# Altium PCB Main-Flight-Computer-Card.PcbDoc
Units mm, origin at the board's own origin, x right, y up, seen from the top; angles counter-clockwise.
Board outline 100 x 100 mm, 4 copper layers (Top Layer, Int1 (GND), Int2 (PWR), Bottom Layer), stack 1.369 mm thick; 2 components, 0 nets, 72 pads, 0 vias.
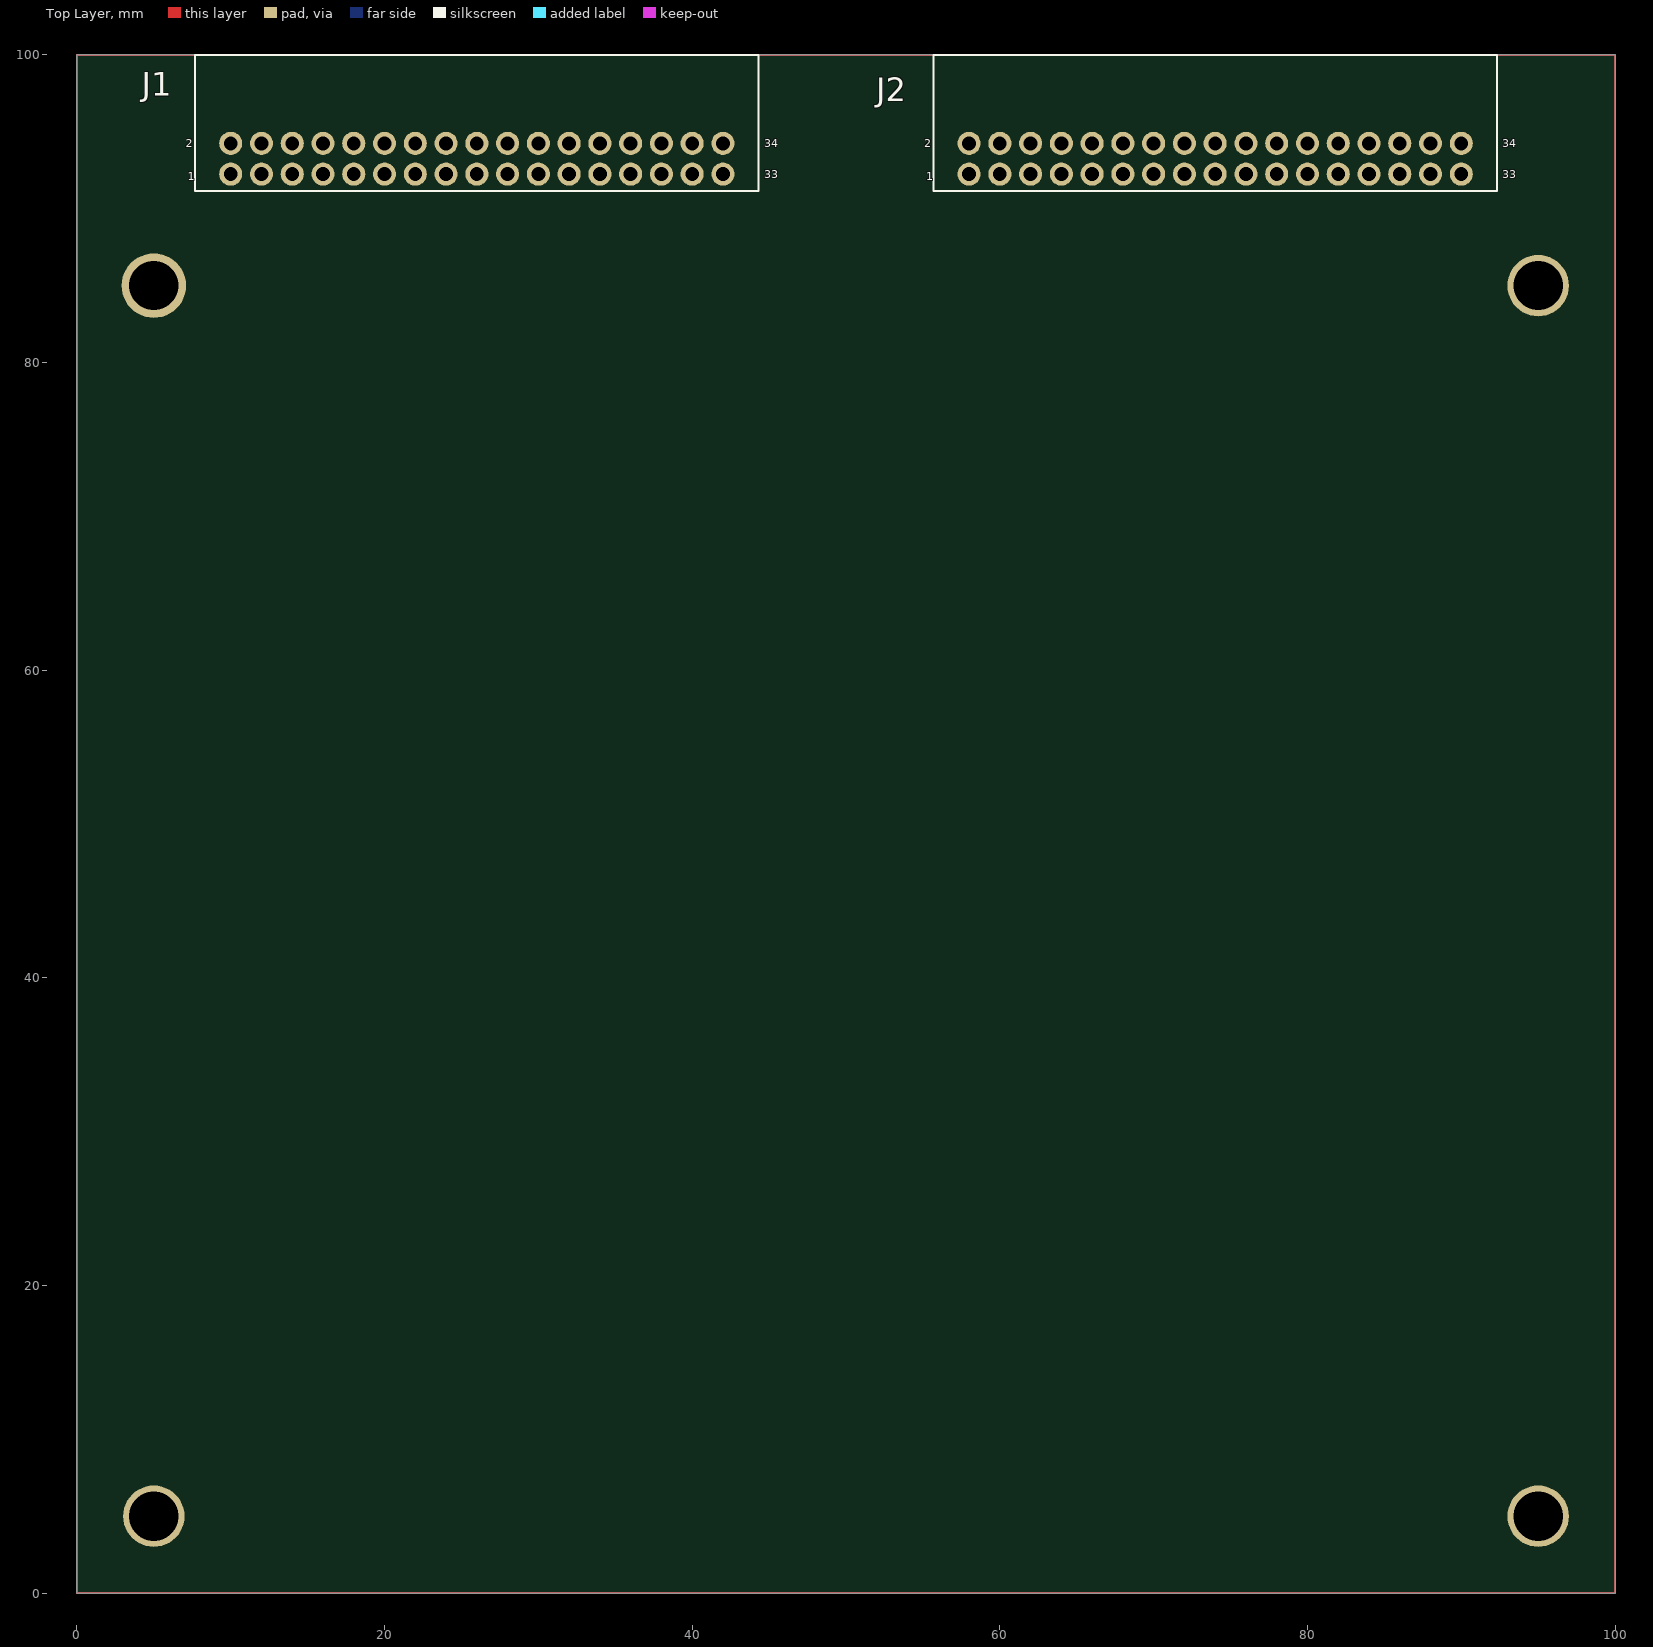
[diagram p0: Top Layer view]
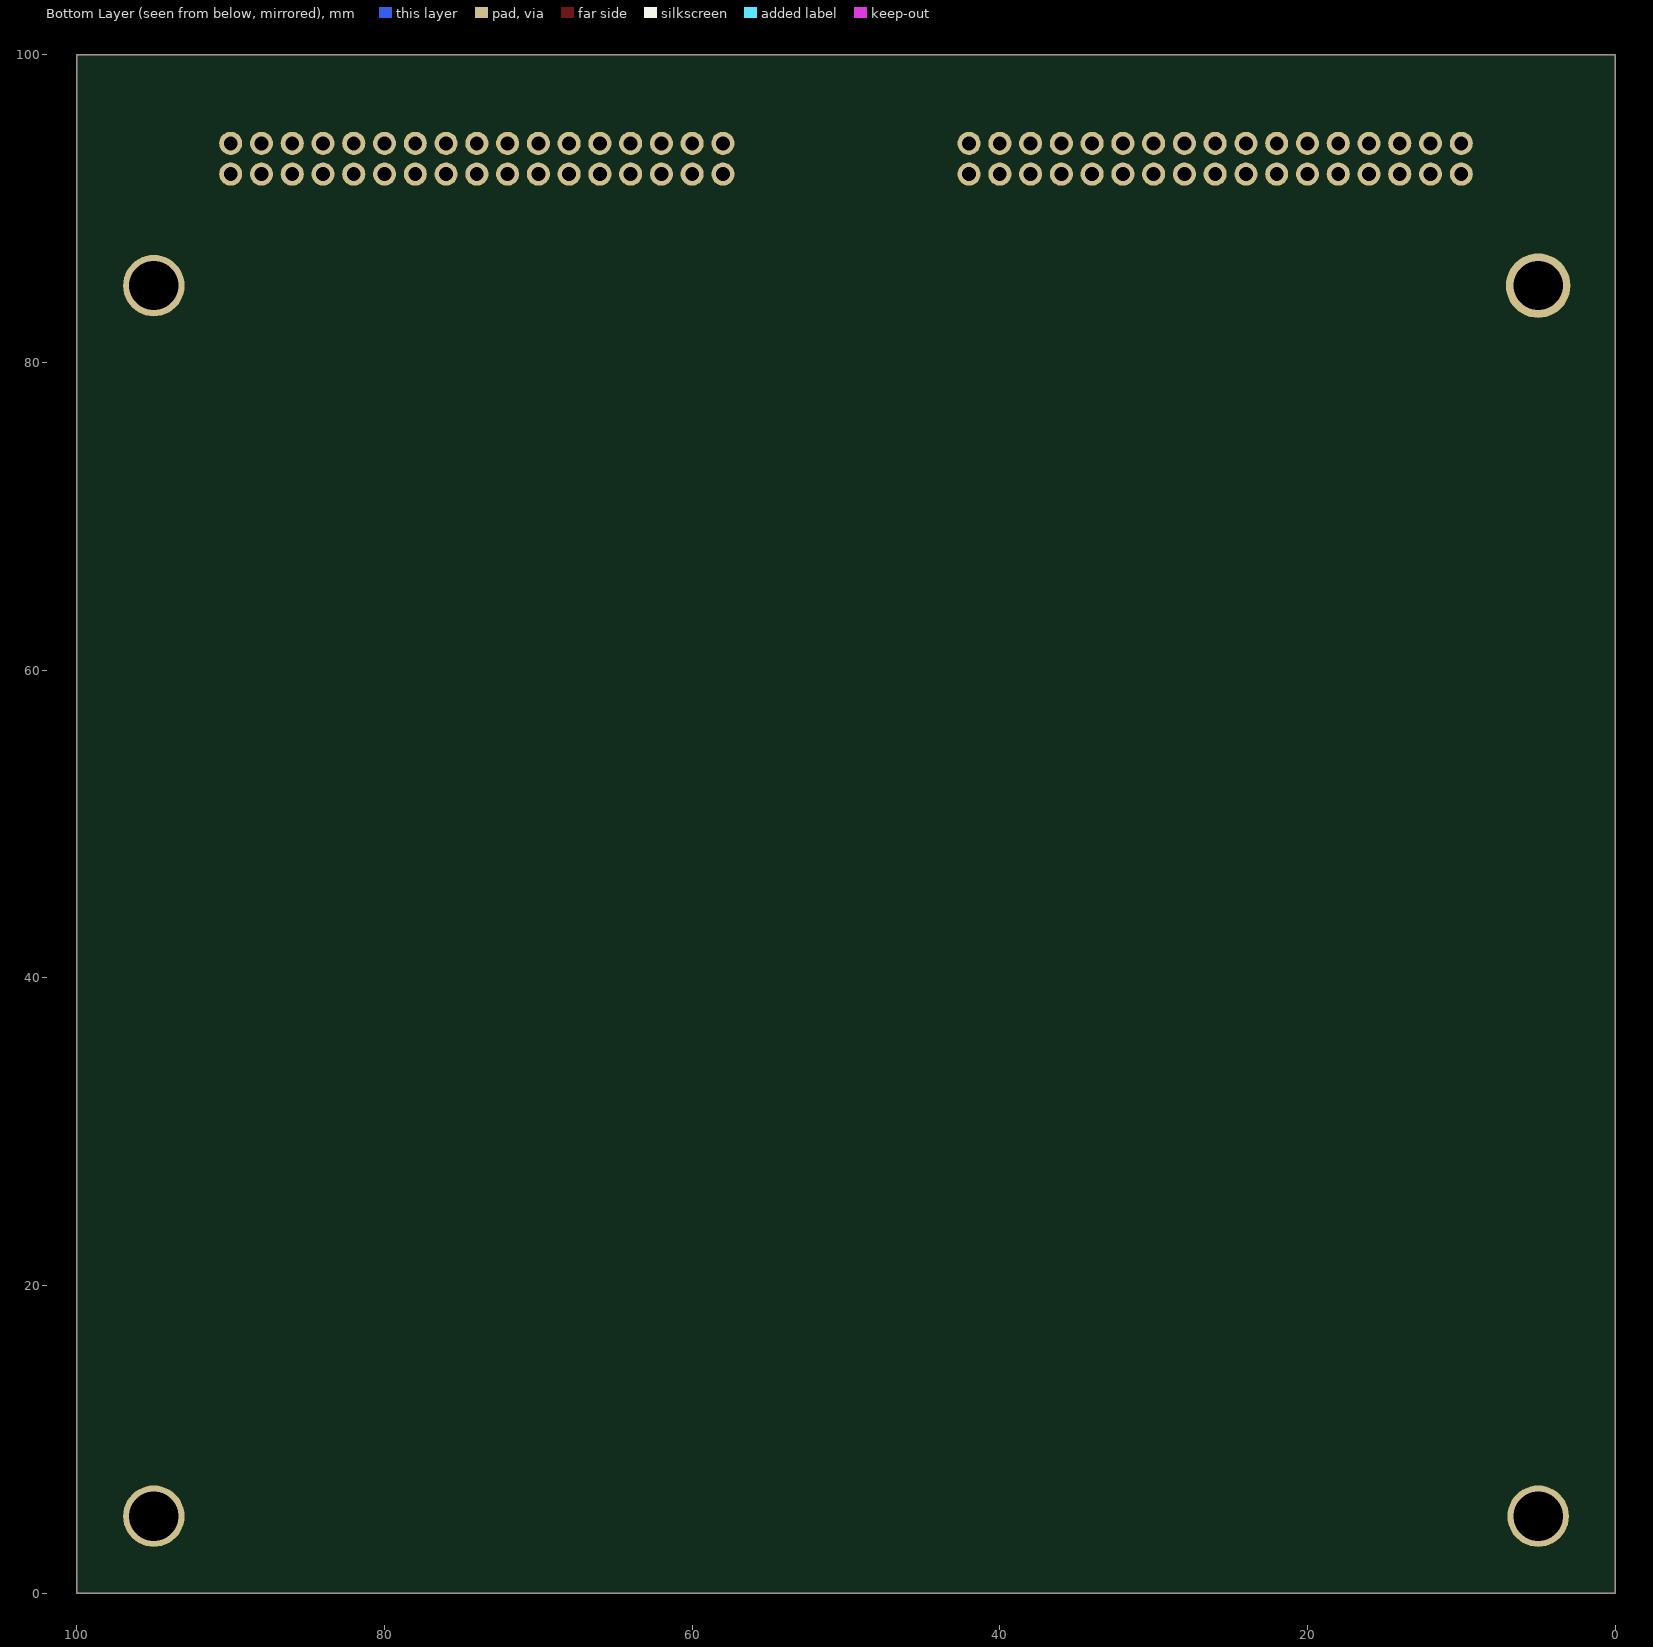
[diagram p1: Bottom Layer view, seen from below]
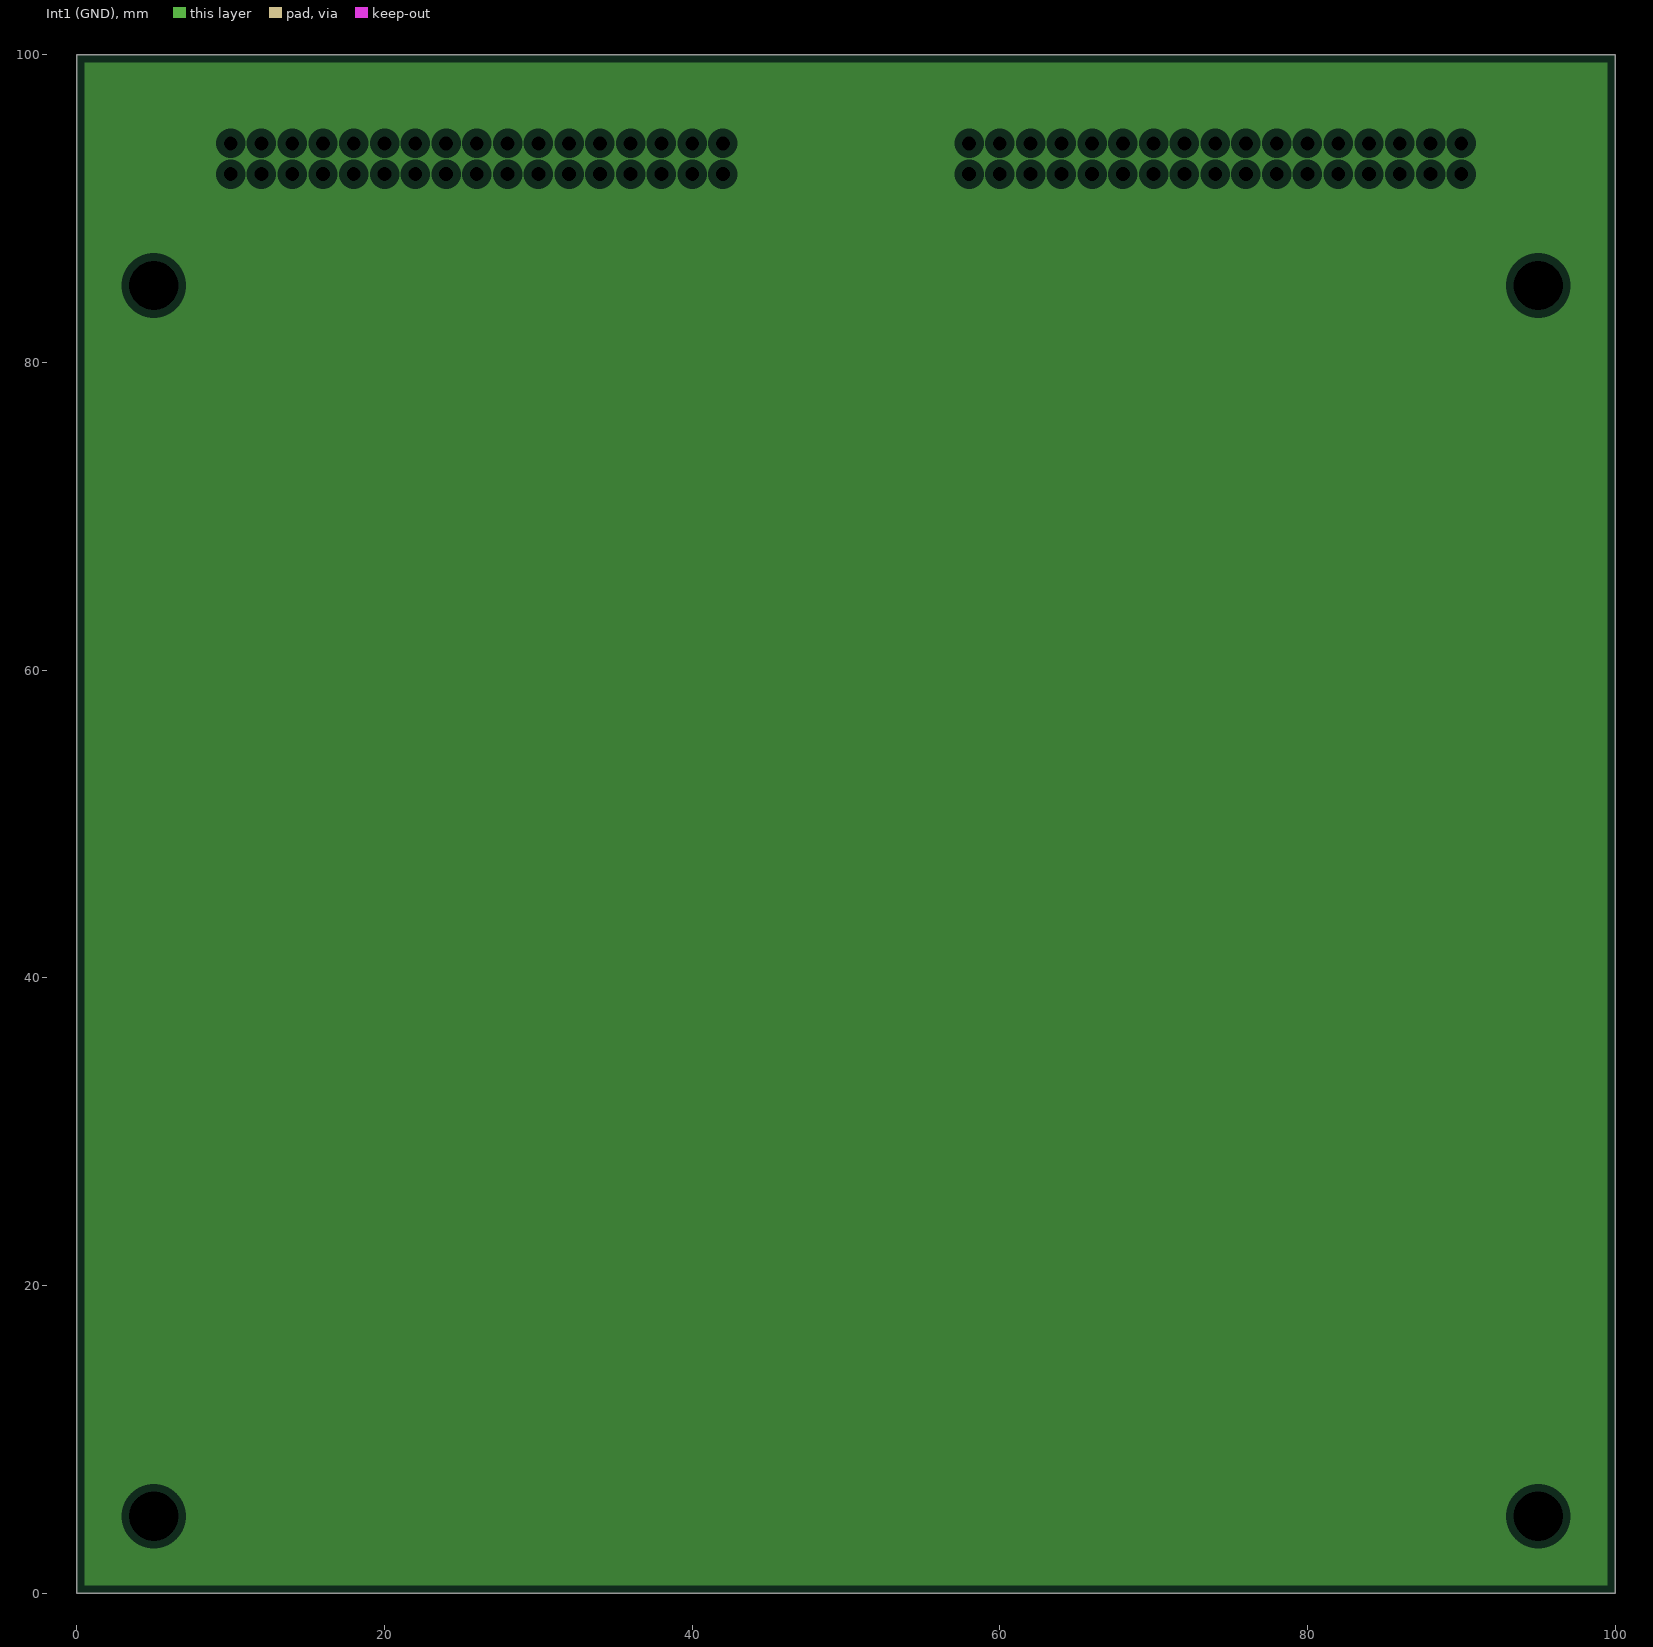
[diagram p2: Int1 (GND), clearances drawn from the general rule]
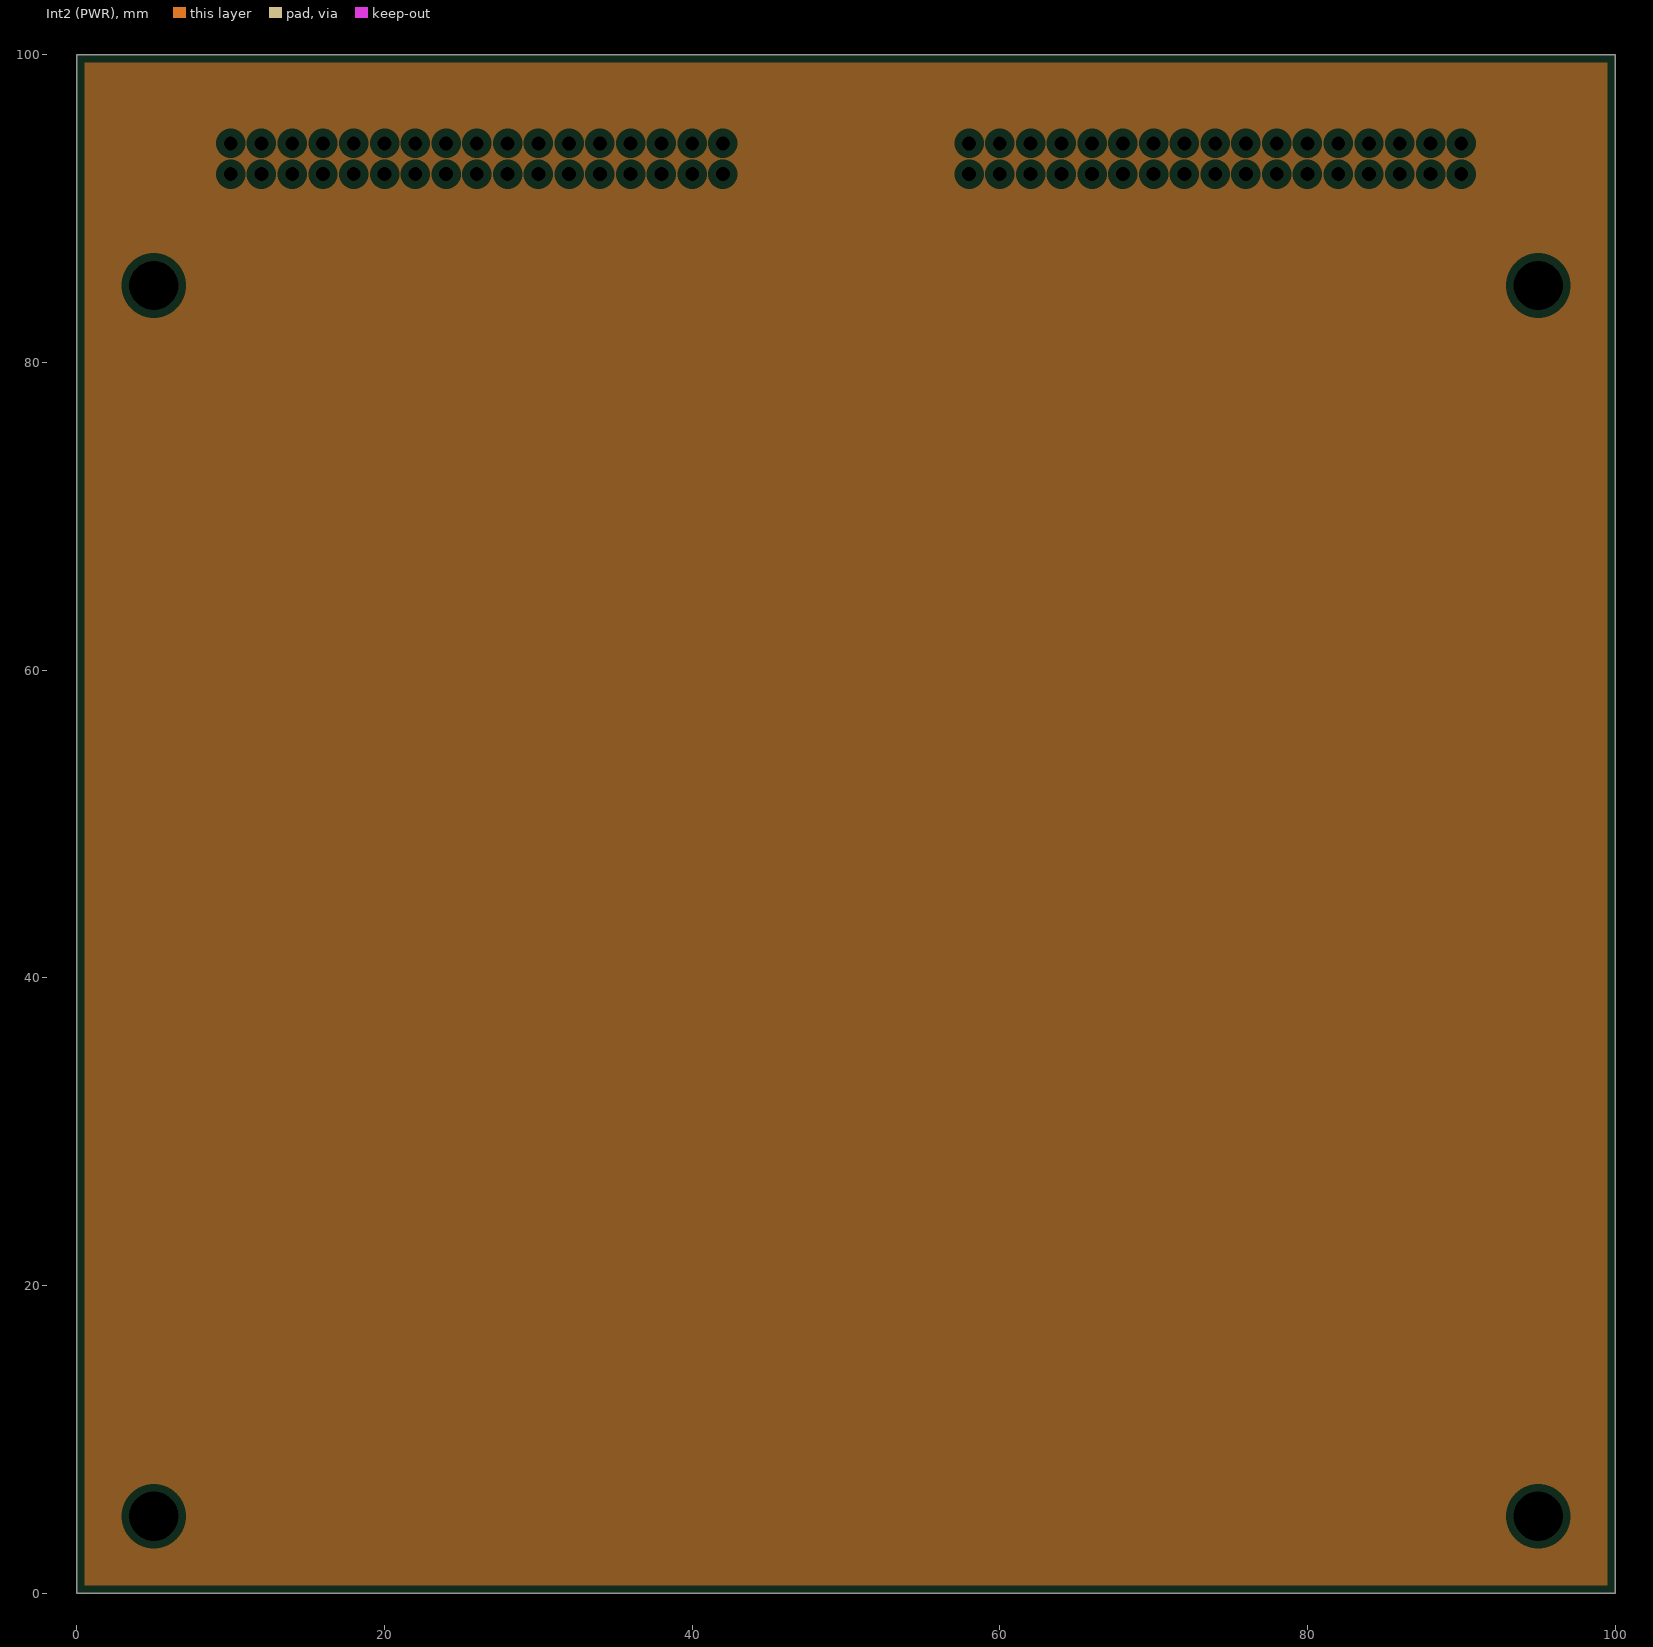
[diagram p3: Int2 (PWR), clearances drawn from the general rule]

## Layer stack, top to bottom
Top Solder: solder mask 0.0254, SM-001, Dk 4
Top Layer: signal copper 0.035
Dielectric 1: prepreg 0.1295, PP-017, Dk 4.3
Dielectric 2: prepreg 0.1295, PP-017, Dk 4.3
Int1 (GND): plane copper 0.035
Dielectric 3: core 0.7112, Core-039, Dk 4.8
Int2 (PWR): plane copper 0.035
Dielectric 4: prepreg 0.1295, PP-017, Dk 4.3
Dielectric 5: prepreg 0.1295, PP-017, Dk 4.3
Bottom Layer: signal copper 0.035
Bottom Solder: solder mask 0.0254, SM-001, Dk 4

## Board outline
0,0 100,0 100,100 0,100

## Design rules (kind name [scope] priority, off if disabled: settings)
Clearance [All] p1: gap=0.254 ignorepadtopadclearanceinfootprint=FALSE except(0: Arc-Hole Track-Hole SMDPad-Hole THPad-Hole Via-Hole Fill-Hole Poly-Hole Region-Hole Text-Hole)
PlaneClearance [All] p1: clearance=0.508
PlaneConnect [All] p1: planeconnectstyle=Relief reliefexpansion=0.508 reliefentries=4 reliefconductorwidth=0.254 reliefairgap=0.254
PolygonConnect [All] p1: connectstyle=Relief reliefconductorwidth=0.254 reliefentries=4 polygonreliefangle="90 Angle" airgapwidth=0.254
RoomDefinition MFC-Card-Template [InComponentClass('MFC-Card-Template')] p1: confinementstyle=ConfineIn formatcopy=TRUE lockcomponents=FALSE outline 121.158,1.651 141.859,1.651 141.859,43.18 121.158,43.18
RoutingVias [All] p1: holewidth=0.711 width=1.27 viastyle="Through Hole" minholewidth=0.711 minwidth=1.27 maxholewidth=0.711 maxwidth=1.27
SolderMaskExpansion [All] p1: expansion=0.102
Width [All] p1: maxlimit=0.254 minlimit=0.254 preferedwidth=0.254
28 further rules are at their usual default settings.

## Components (designator, comment, footprint, x,y, rotation, side; value= is the part's Value field where it differs from the comment)
J1 "0878333420" 0878333420 10,94.25 r0 top
J2 "0878333420" 0878333420 58,94.25 r0 top

## Footprints (in the part's own frame and the unit in brackets; to place one, negate y for a bottom-side part, rotate by r counter-clockwise, add the part's x,y. Pads: shape width x height; smd on the part's side, far side on the other; paste and mask are expansions set on the pad)
0878333420 [mm] "34 pin milli-grid header, right-angle"
  round 1.5 hole 0.9: 1(0,-2) 2(0,0) 3(2,-2) 4(2,0) 5(4,-2) 6(4,0) 7(6,-2) 8(6,0) 9(8,-2) 10(8,0) 11(10,-2) 12(10,0) 13(12,-2) 14(12,0) 15(14,-2) 16(14,0) 17(16,-2) 18(16,0) 19(18,-2) 20(18,0) 21(20,-2) 22(20,0) 23(22,-2) 24(22,0) 25(24,-2) 26(24,0) 27(26,-2) 28(26,0) 29(28,-2) 30(28,0) 31(30,-2) 32(30,0) 33(32,-2) 34(32,0)
  silkscreen extent -2.32,-3.09 34.33,5.75, body extent -2.32,-2.25 34.33,6.4, height 6.35

## Part data
J1 J2: Supplier Part Number 1=WM20555-ND, Supplier 1=Digi-Key

## Free pads (board coordinates)
  round 4 hole 3.2 unplated: 11(5,5) 11(95,5) 11(95,85)
  round 4.2 hole 3.2 unplated: 11(5,85)

## Nets (pads, with @x,y where several pads share a name; then routed paths per layer and width w, separated by ;. In a path a pad name is that pad's centre, name@x,y a point inside that pad or via, vN(x,y) a via of type N, cw(c..) or ccw(c..) an arc to the next point about the centre after c; other vN are vias at no path point)
pads on no net: J1.1 J1.2 J1.3 J1.4 J1.5 J1.6 J1.7 J1.8 J1.9 J1.10 J1.11 J1.12 J1.13 J1.14 J1.15 J1.16 J1.17 J1.18 J1.19 J1.20 J1.21 J1.22 J1.23 J1.24 J1.25 J1.26 J1.27 J1.28 J1.29 J1.30 J1.31 J1.32 J1.33 J1.34 J2.1 J2.2 J2.3 J2.4 J2.5 J2.6 J2.7 J2.8 J2.9 J2.10 J2.11 J2.12 J2.13 J2.14 J2.15 J2.16 J2.17 J2.18 J2.19 J2.20 J2.21 J2.22 J2.23 J2.24 J2.25 J2.26 J2.27 J2.28 J2.29 J2.30 J2.31 J2.32 J2.33 J2.34
copper on no net: | length 400
  Top Layer w0.127: 0,0 100,0 100,100 0,100 0,0

## Polygon pours and split planes (outlines as drawn)
no net on Int1 (GND) (split plane): 99.49,0.51 0.51,0.51 0.51,99.49 99.49,99.49
no net on Int2 (PWR) (split plane): 99.49,0.51 0.51,0.51 0.51,99.49 99.49,99.49

## Text inside footprints (layer, text, board x,y; h text height)
J1: Top Overlay "34" at 44.671,93.996 h0.51; Top Overlay "33" at 44.671,91.964 h0.51; Top Overlay "2" at 7.079,93.996 h0.51; Top Overlay "1" at 7.206,91.837 h0.51
J2: Top Overlay "34" at 92.671,93.996 h0.51; Top Overlay "33" at 92.671,91.964 h0.51; Top Overlay "2" at 55.079,93.996 h0.51; Top Overlay "1" at 55.206,91.837 h0.51